# Altium PCB CG65_PCB.PcbDoc
Units mm, origin at the board's own origin, x right, y up, seen from the top; angles counter-clockwise.
Board outline 54.61 x 85.34 mm, 2 copper layers (Top Layer, Bottom Layer); 14 components, 13 nets, 81 pads, 0 vias.
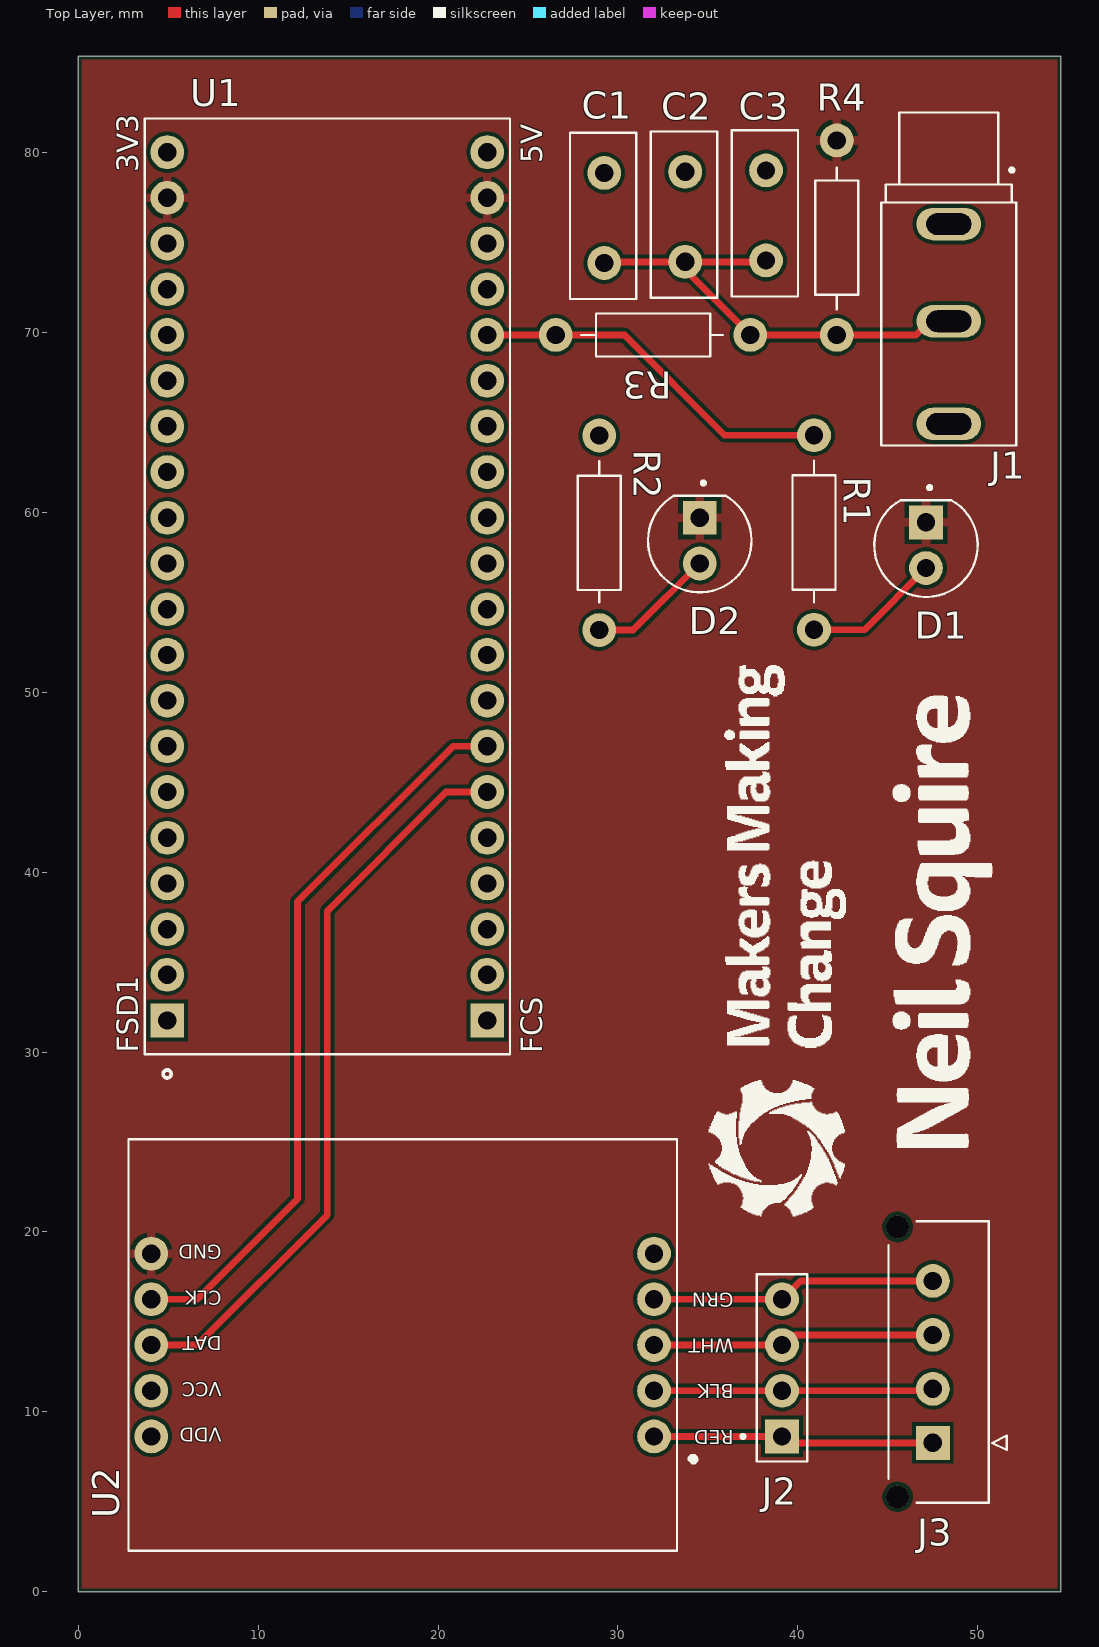
[diagram p0: Top Layer view]
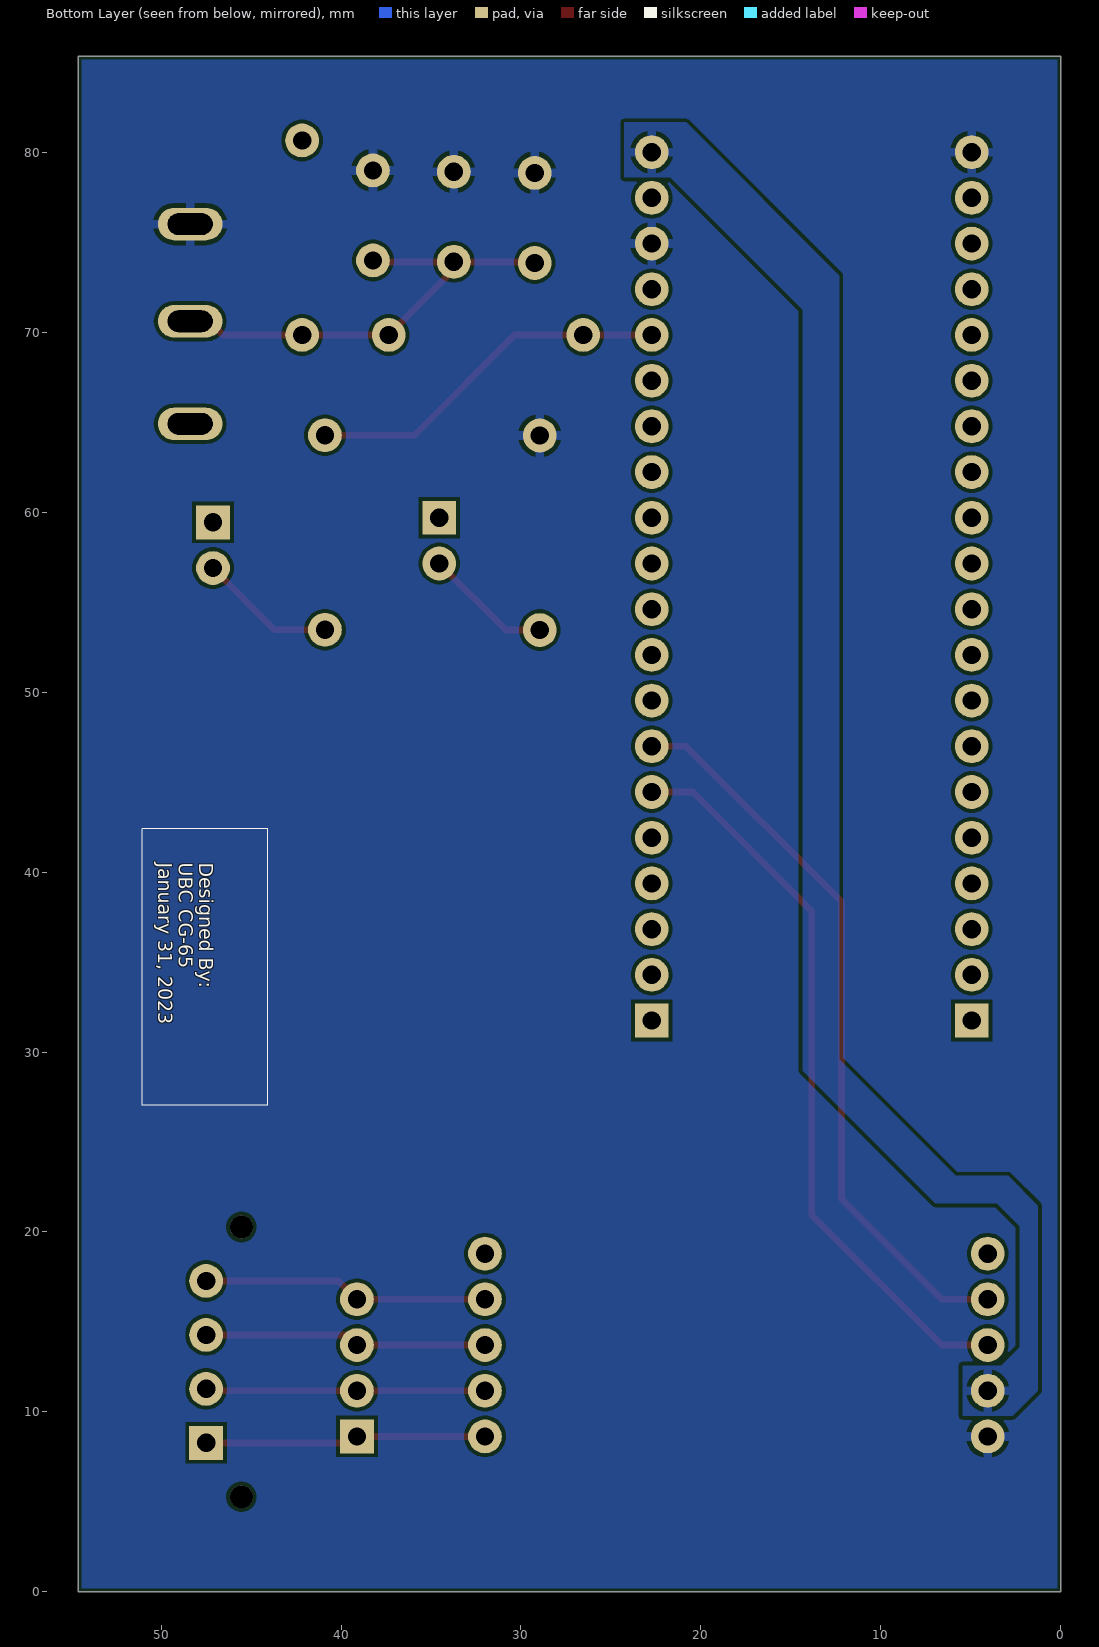
[diagram p1: Bottom Layer view, seen from below]

## Layer stack, top to bottom
Top Solder: solder mask 0.0102, Solder Resist, Dk 3.5
Top Layer: signal copper 0.0356
Dielectric 1: dielectric 0.32, FR-4, Dk 4.8
Bottom Layer: signal copper 0.0356
Bottom Solder: solder mask 0.0102, Solder Resist, Dk 3.5

## Board outline
0,0 54.61,0 54.61,85.344 0,85.344

## Design rules (kind name [scope] priority, off if disabled: settings)
BoardOutlineClearance [All] p1: gap=0.2 ignorepadtopadclearanceinfootprint=FALSE except(0.4: Arc-SplitBarrior Arc-SplitContinuation Track-SplitBarrior Track-SplitContinuation SMDPad-SplitBarrior SMDPad-SplitContinuation THPad-SplitBarrior THPad-SplitContinuation Via-SplitBarrior Via-SplitContinuation Fill-SplitBarrior Fill-SplitContinuation Poly-SplitBarrior Poly-SplitContinuation Region-SplitBarrior Region-SplitContinuation Text-SplitBarrior Text-SplitContinuation)
Clearance "Clearance Bottom Layer" [OnLayer('Bottom Layer')] p1: gap=0.203 ignorepadtopadclearanceinfootprint=TRUE except(0.254: Arc-Text Track-Text SMDPad-Text THPad-Text Via-Text Fill-Text Poly-Text Region-Text Text-Text)
Clearance "Clearance Top Layer" [OnLayer('Top Layer')] p2: gap=0.203 ignorepadtopadclearanceinfootprint=TRUE except(0.254: Arc-Text Track-Text SMDPad-Text THPad-Text Via-Text Fill-Text Poly-Text Region-Text Text-Text)
Clearance [All] p3: gap=0.2 ignorepadtopadclearanceinfootprint=FALSE except(0.089: Arc-Arc Arc-Track Arc-SMDPad Track-Track Track-SMDPad SMDPad-SMDPad; 0.127: Arc-Via Track-Via SMDPad-Via THPad-Via Via-Via; 0.254: Arc-Text Track-Text SMDPad-Text THPad-Text Via-Text Fill-Text Poly-Text Region-Text Text-Text)
HoleSize [All] p1: absolutevalues=TRUE maxlimit=6.3 minlimit=0.2 maxpercent=80.000 minpercent=20.000
MinimumAnnularRing [All] p1: minimumring=0.076
MinimumSolderMaskSliver [All] p1: minsoldermaskwidth=0.1
PolygonConnect PolygonConnect_1 [All] p1: thpad.connectstyle=Relief thpad.reliefconductorwidth=0.508 thpad.reliefentries=4 thpad.polygonreliefangle="90 Angle" thpad.airgapwidth=0.254 smdpad.connectstyle=Relief smdpad.reliefconductorwidth=0.508 smdpad.reliefentries=4 smdpad.polygonreliefangle="90 Angle" smdpad.airgapwidth=0.254 via.connectstyle=Direct via.reliefconductorwidth=0.508 via.reliefentries=4 via.polygonreliefangle="90 Angle" via.airgapwidth=0.254
RoutingCorners [All] p1: cornerstyle=Round minsetback=2.54 maxsetback=2.54
RoutingVias [All] p1: holewidth=0.5 width=1 viastyle="Through Hole" minholewidth=0.2 minwidth=0.45 maxholewidth=1 maxwidth=2
SilkToSilkClearance [All] p1: silktosilkclearance=0.1
SilkToSolderMaskClearance [IsPad] p1: minsilkscreentomaskgap=0.1 clearancetoexposedcopper=TRUE
SolderMaskExpansion [All] p1: expansion=0.102 istentingtop=FALSE
Width [All] p1: maxlimit=2.54 minlimit=0.089 preferedwidth=0.381
25 further rules are at their usual default settings.

## Components (designator, comment, footprint, x,y, rotation, side; value= is the part's Value field where it differs from the comment)
C1 "0.33uF" "TH CAPACITOR" 29.236,73.849 r90 top
C2 "0.33uF" "TH CAPACITOR" 33.732,73.914 r90 top
C3 "0.33uF" "TH CAPACITOR" 38.227,73.99 r90 top
D1 "LED" "LED TH" 47.117,59.436 r270 top
D2 "LED" "LED TH" 34.544,59.69 r270 top
J1 "MJ-3502" MJ-3502N 48.387,76.012 r270 top
J2 "1x4 Header" "1x4 Standard Header" 39.116,8.636 r90 top
J3 "Molex 436500427" MOLEX_436500427 47.498,8.277 r270 top
R1 "220 Ohms" "TH Resistor" 40.894,53.467 r90 top
R2 "220 Ohms" "TH Resistor" 28.956,53.452 r90 top
R3 "22k" "TH Resistor" 37.353,69.85 r180 top
R4 "4.7k" "TH Resistor" 42.164,80.66 r270 top
U1 "ESP32-PICO-D4" ESP32-PICO-KIT 4.953,31.75 r90 top
U2 "LOAD CELL AMP HX711" SEN-13879 32.004,8.636 r180 top

## Footprints (in the part's own frame and the unit in brackets; to place one, negate y for a bottom-side part, rotate by r counter-clockwise, add the part's x,y. Pads: shape width x height; smd on the part's side, far side on the other; paste and mask are expansions set on the pad)
"1x4 Standard Header" [mil]
  rect 74x74 hole 40: 1(0,0)
  round 74 hole 40: 2(100,0) 3(200,0) 4(300,0)
  silkscreen extent -55,-55 355,89
ESP32-PICO-KIT [mil] "Standard Microcontroller"
  rect 74x74 hole 40: J2_1(0,0) J3_1(0,-700)
  round 74 hole 40: J2_2(100,0) J2_3(200,0) J2_4(300,0) J2_5(400,0) J2_6(500,0) J2_7(600,0) J2_8(700,0) J2_9(800,0) J2_10(900,0) J2_11(1000,0) J2_12(1100,0) J2_13(1200,0) J2_14(1300,0) J2_15(1400,0) J2_16(1500,0) J2_17(1600,0) J2_18(1700,0) J2_19(1800,0) J2_20(1900,0) J3_2(100,-700) J3_3(200,-700) J3_4(300,-700) J3_5(400,-700) J3_6(500,-700) J3_7(600,-700) J3_8(700,-700) J3_9(800,-700) J3_10(900,-700) J3_11(1000,-700) J3_12(1100,-700) J3_13(1200,-700) J3_14(1300,-700) J3_15(1400,-700) J3_16(1500,-700) J3_17(1600,-700) J3_18(1700,-700) J3_19(1800,-700) J3_20(1900,-700)
  silkscreen extent -126,-750 1974,50
"LED TH" [mil] "Standard 5mm Through Hole LED"
  rect 74x74 hole 40: 1(0,0)
  round 74 hole 40: 2(100,0)
  silkscreen extent -80,-113 163,113
MJ-3502N [mm] "3.5mm Mono Jack RA"
  oval 1.8x3.6 hole 1.2 slot 2.5 at 90 deg: 1(0,0) 2(5.4,0) 3(11.1,0)
  silkscreen extent -6.2,-3.75 12.3,3.75
MOLEX_436500427 [mm]
  rect 1.88x1.88 hole 1.02 mask+0.076: 1(0,0)
  round 1.88 hole 1.02 mask+0.076: 2(-3,0) 3(-6,0) 4(-9,0)
  round 1.27 hole 1.27 unplated mask+0.076: M1(3,-1.96) M2(-12,-1.96)
  silkscreen extent -12.32,-2.47 3.32,4.1, body extent -12.33,-2.47 3.32,3.1, height 10
SEN-13879 [mil] "Load Cell Amplifier"
  round 74 hole 40: 1(0,0) 2(0,-100) 3(0,-200) 4(0,-300) 5(0,-400) 6(1100,-400) 7(1100,-300) 8(1100,-200) 9(1100,-100) 10(1100,0)
  silkscreen extent -91,-650 1150,250
"TH CAPACITOR" [mil]
  round 74 hole 40: 1(0,0) 2(197,0)
  silkscreen extent -79,-70 285,75
"TH Resistor" [mil]
  round 74 hole 40: 1(0,0) 2(425.59,0)
  silkscreen extent 60,-47 370,47

## Part data
C1 C2 C3: library part Capacitor, "Standard Capacitor, Through Hole", Supplier Part Number 1=74X9713, Supplier 1=Newark
D1: library part "LED Blue", "2V Blue LED Through Hole"
D2: library part "LED Green", "2V Green LED Through Hole"
J1: "3.5 mm, Mono, Right Angle, Through Hole, Threaded Bushing, Audio Jack Connector", Body Color=Black, Current Rating=1A, Manufacturer=CUI, Supplier Part Number 1=CP-3502MJ-ND, Body Material=Brass, Category=Uncategorized, Color=Black, ComponentLink1Description=https://www.cui.com/product/resource/digikeypdf/mj-3502.pdf?src-supplier=Digi-Key, ComponentLink1URL=https://www.cui.com/product/resource/digikeypdf/mj-3502.pdf?src-supplier=Digi-Key, Connector Type=Jack, Contact Plating=Silver, Diameter=3.5mm, Gender=Female, Lead Free="Lead Free", Manufacturer Part Number=MJ-3502, Mount="Through Hole,Panel", Number of Conductors=2, Number of Ports=1, Orientation=Horizontal, Packaging=Bulk, RoHS=Yes, Series=-, Shielding=Unshielded, Supplier 1=Digi-Key, Termination=Solder
J2: "Standard 0.1\" Header 1x4"
J3: "Molex MicroFit 3.0 Header 1x4, mates with 0436450400"
R1 R2 R3 R4: library part Resistor, "Standard Resistor, Through Hole, 1/8W"
U1: library part ESP32-PICO-KIT, "ESP32 Wifi Bluetooth Eval Board", Frequency=2.4GHz, Manufacturer="Espressif Systems", Supplier Part Number 1=1904-1030-ND, Category="RF Semiconductors and Devices", ComponentLink1Description=https://esp-idf.readthedocs.io/en/latest/get-started/get-started-pico-kit.html?src-supplier=Digi-Key, ComponentLink1URL=https://esp-idf.readthedocs.io/en/latest/get-started/get-started-pico-kit.html?src-supplier=Digi-Key, Manufacturer Part Number=ESP32-PICO-KIT, Pricing 1="1=10.00000 (USD)", RoHS=No, Stock 1=467, Supplier 1=Digi-Key
U2: "HX711 Load Cell Amplifier", Manufacturer=SparkFun, Manufacturer Part Number=SEN-13879, Max Operating Temperature=85°C, Min Operating Temperature=-45°C, Operating Supply Current=1.5mA, Supplier Part Number 1=1568-1436-ND, Output Type=Digital, Pricing 1="1=10.95000 (USD)", RoHS=No, Stock 1=1086, Supplier 1=Digi-Key

## Nets (pads, with @x,y where several pads share a name; then routed paths per layer and width w, separated by ;. In a path a pad name is that pad's centre, name@x,y a point inside that pad or via, vN(x,y) a via of type N, cw(c..) or ccw(c..) an arc to the next point about the centre after c; other vN are vias at no path point)
3.3V: C1.2 C2.2 C3.2 J1.1 R2.2 U1.J2_20 U1.J3_18 U2.10
5V: U1.J3_20 U2.9
BLK: J2.2 J3.2 U2.2 | length 15.5
  Top Layer w0.381: U2.2 J2.2 47.397,11.176 J3.2
GND: D1.1 D2.1 R4.1 U1.J2_19 U1.J3_19 U2.6
GRN: J2.4 J3.4 U2.4 | length 15.9
  Top Layer w0.381: U2.4 J2.4 40.137,17.277 J3.4
IO4: R1.2 R3.2 U1.J3_16 | length 20.5
  Top Layer w0.381: U1.J3_16 R3.2 30.353,69.85 35.926,64.277 R1.2
IO25: U1.J3_6 U2.8 | length 41.3
  Top Layer w0.381: U2.8 6.604,13.716 13.843,20.955 13.843,37.846 20.447,44.45 U1.J3_6
IO26: U1.J3_7 U2.7 | length 41.1
  Top Layer w0.381: U2.7 6.604,16.256 12.192,21.844 12.192,38.354 20.828,46.99 U1.J3_7
NetC1_1: C1.1 C2.1 C3.1 J1.2 R3.1 R4.2 | length 26
  Top Layer w0.381: C1.1 29.301,73.914 C2.1 ; C3.1 38.151,73.914 C2.1 ; J1.2 47.316,70.612 46.554,69.85 R4.2 R3.1 34.018,73.185 34.018,73.627 C2.1
NetD1_2: D1.2 R1.1 | length 7.6
  Top Layer w0.381: R1.1 43.688,53.467 D1.2
NetD2_2: D2.2 R2.1 | length 7.1
  Top Layer w0.381: R2.1 30.846,53.452 D2.2
RED: J2.1 J3.1 U2.1 | length 15.6
  Top Layer w0.381: U2.1 J2.1 39.475,8.277 J3.1
WHT: J2.3 J3.3 U2.3 | length 15.7
  Top Layer w0.381: U2.3 J2.3 39.286,13.716 39.847,14.277 J3.3
pads on no net: J1.3 J3.M1 J3.M2 U1.J2_1 U1.J2_2 U1.J2_3 U1.J2_4 U1.J2_5 U1.J2_6 U1.J2_7 U1.J2_8 U1.J2_9 U1.J2_10 U1.J2_11 U1.J2_12 U1.J2_13 U1.J2_14 U1.J2_15 U1.J2_16 U1.J2_17 U1.J2_18 U1.J3_1 U1.J3_2 U1.J3_3 U1.J3_4 U1.J3_5 U1.J3_8 U1.J3_9 U1.J3_10 U1.J3_11 U1.J3_12 U1.J3_13 U1.J3_14 U1.J3_15 U1.J3_17 U2.5

## Polygon pours and split planes (outlines as drawn)
3.3V on Bottom Layer "NONET_L02_P-001" (solid, pour order 3): -2.413,87.503 56.134,87.503 56.134,-3.683 -2.667,-3.683
5V on Bottom Layer "NONET_L02_P-001" (solid, pour order 1): 24.257,81.661 24.257,78.613 21.717,78.613 14.351,71.247 14.351,28.956 6.985,21.59 3.556,21.59 2.286,20.32 2.286,13.589 3.302,12.573 5.461,12.573 5.461,9.779 2.667,9.779 1.27,11.176 1.27,21.463 2.921,23.114 5.842,23.114 12.319,29.591 12.319,73.152 20.828,81.661
GND on Top Layer "NONET_L02_P-001" (solid, pour order 0): -2.413,87.249 56.642,87.249 56.642,-2.032 -2.667,-2.032

## Silkscreen, mask and mechanical layers (free items; w line width, h text height)
Top Overlay:
  drawing of 37 lines, arcs and shapes, not listed
Bottom Overlay:
  lines w0.05: 44.069,27.051 51.054,27.051 51.054,42.418 44.069,42.418 44.069,27.051
  text "Designed By: / UBC CG-65 / January 31, 2023" at 50.165,40.513 h0.76 r90
Mechanical 1:
  the board outline again, w0.1

## Text inside footprints (layer, text, board x,y; h text height)
U1: Top Overlay "FSD1" at 3.337,29.958 h1.2 r90; Top Overlay "FCS" at 25.796,29.94 h1.2 r90; Top Overlay "3V3" at 3.337,78.88 h1.2 r90; Top Overlay "5V" at 25.787,79.386 h1.2 r90
U2: Top Overlay "RED" at 36.424,8.992 h0.76 r180; Top Overlay "BLK" at 36.424,11.532 h0.76 r180; Top Overlay "WHT" at 36.424,14.072 h0.76 r180; Top Overlay "GRN" at 36.424,16.612 h0.76 r180; Top Overlay "GND" at 7.976,19.279 h0.76 r180; Top Overlay "CLK" at 7.976,16.739 h0.76 r180; Top Overlay "DAT" at 7.976,14.199 h0.76 r180; Top Overlay "VCC" at 7.976,11.659 h0.76 r180; Top Overlay "VDD" at 7.976,9.119 h0.76 r180